# Altium PCB TP1.PcbDoc
Units mm, origin at the board's own origin, x right, y up, seen from the top; angles counter-clockwise.
Board outline 100 x 50.04 mm, 2 copper layers (Top Layer, Bottom Layer); 28 components, 19 nets, 87 pads, 4 vias.
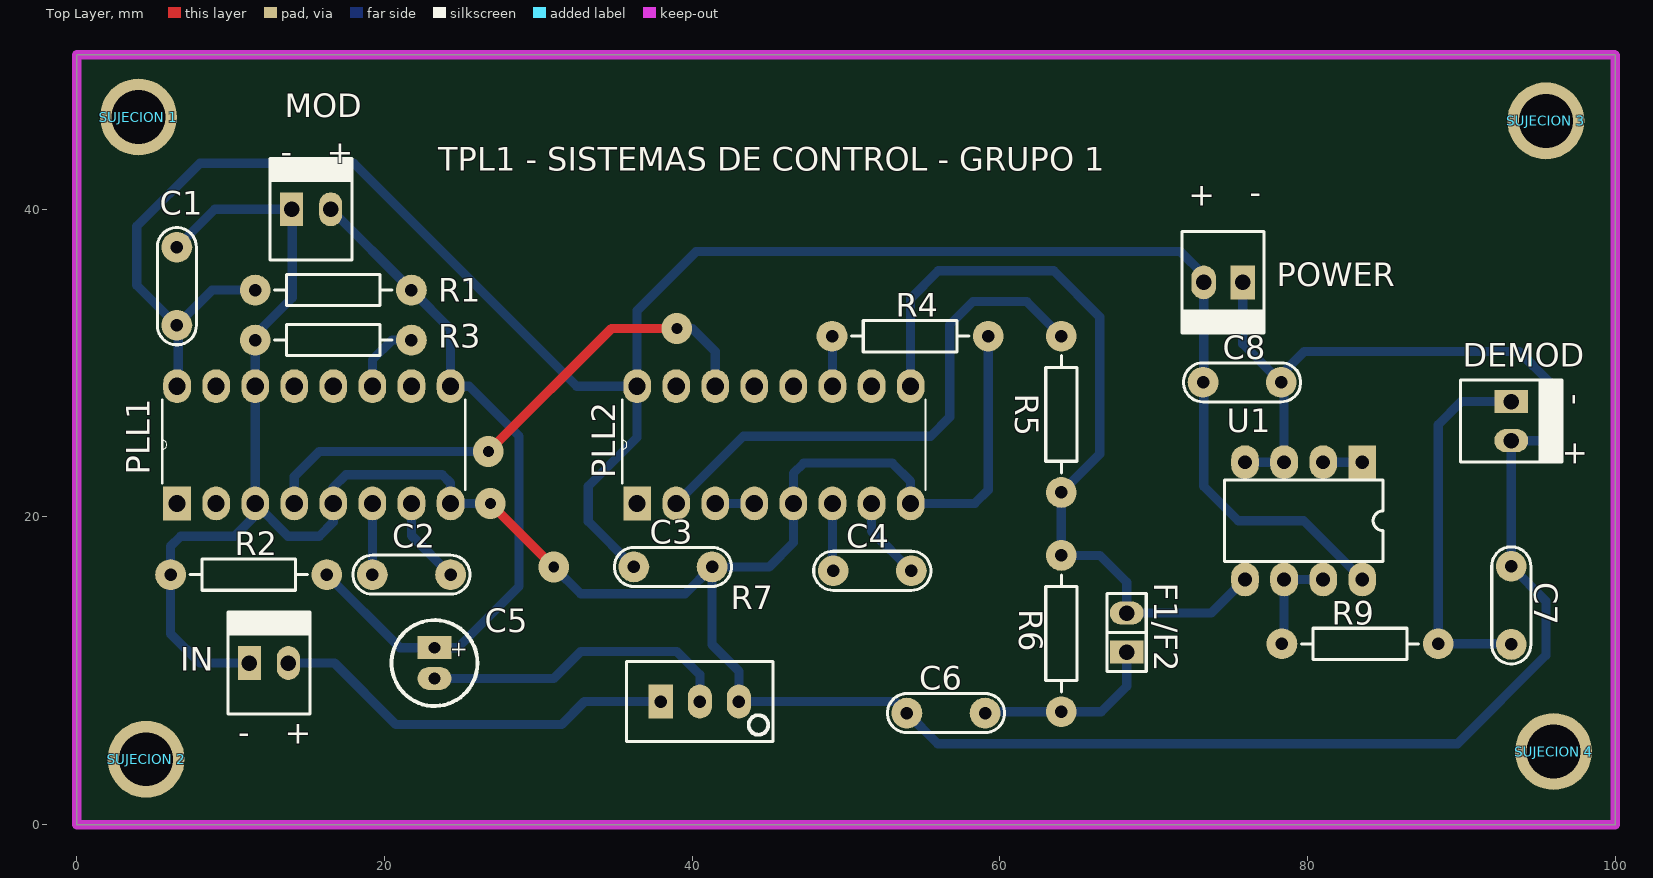
[diagram p0: Top Layer view]
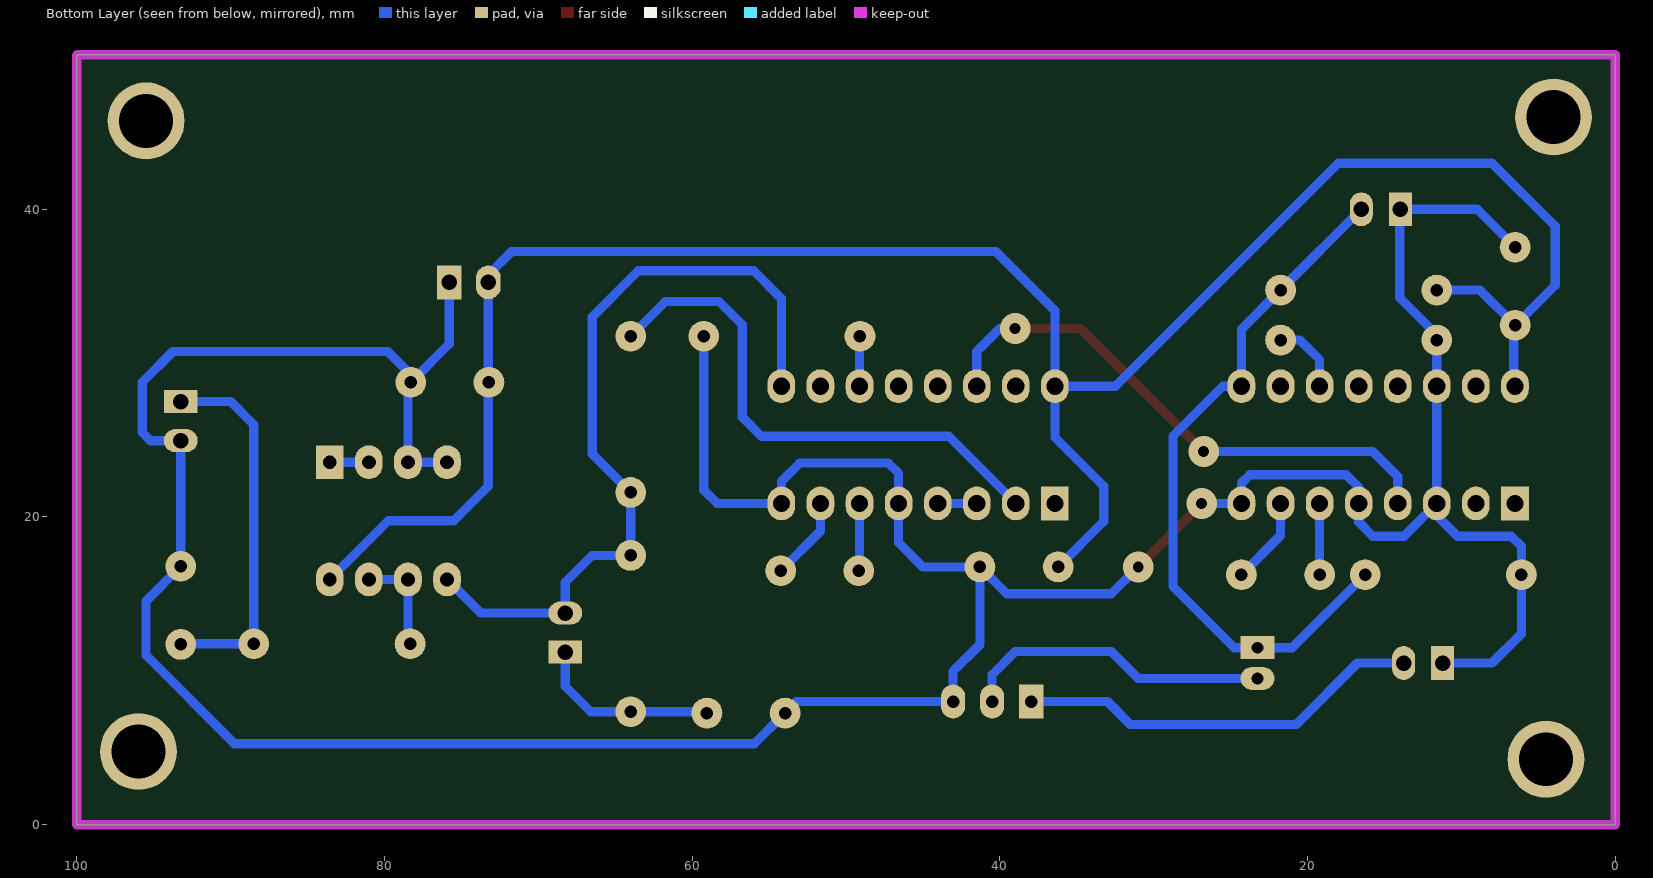
[diagram p1: Bottom Layer view, seen from below]
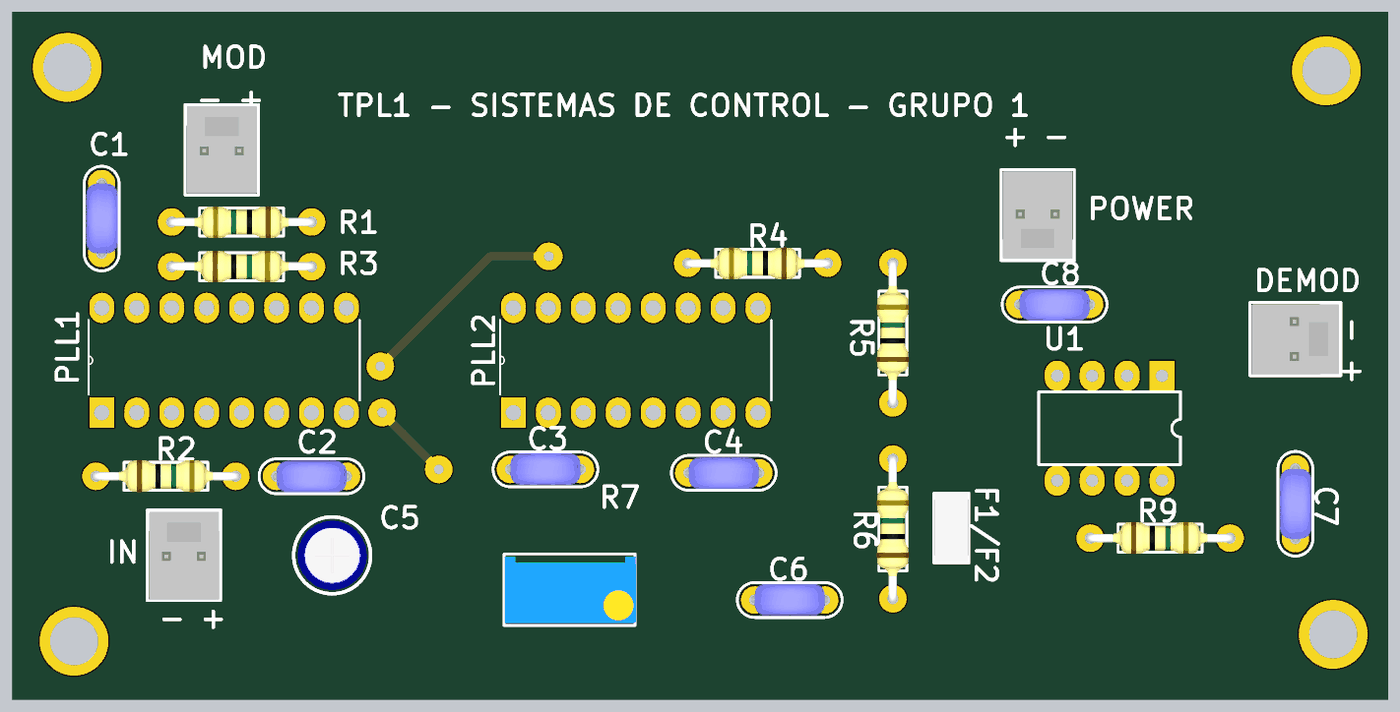
[diagram p2: 3D render of the assembled board from above, using the file's embedded part models]

## Layer stack, top to bottom
Top Solder: solder mask 0.0102, Solder Resist, Dk 3.5
Top Layer: signal copper 0.0356
Dielectric 1: dielectric 0.32, FR-4, Dk 4.8
Bottom Layer: signal copper 0.0356
Bottom Solder: solder mask 0.0102, Solder Resist, Dk 3.5

## Board outline
0,0 0,50.038 99.962,50.038 100,50 100,0

## Design rules (kind name [scope] priority, off if disabled: settings)
Clearance [All] p1: gap=0.254 ignorepadtopadclearanceinfootprint=FALSE except(0: Arc-Hole Track-Hole SMDPad-Hole THPad-Hole Via-Hole Fill-Hole Poly-Hole Region-Hole Text-Hole)
PolygonConnect [All] p1: connectstyle=Relief reliefconductorwidth=0.254 reliefentries=4 polygonreliefangle="90 Angle" airgapwidth=0.254
RoutingVias [All] p1: holewidth=0.711 width=1.27 viastyle="Through Hole" minholewidth=0.711 minwidth=1.27 maxholewidth=0.711 maxwidth=1.27
SolderMaskExpansion [All] p1: expansion=0.102
Width [All] p1: maxlimit=0.6 minlimit=0.6 preferedwidth=0.6
30 further rules are at their usual default settings.

## Components (designator, comment, footprint, x,y, rotation, side; value= is the part's Value field where it differs from the comment)
C1 "100nf" CAP200 6.5,35 r90 top
C2 "100pf" CAP200 21.75,16.25 r0 top
C3 "100nf" CAP200 38.75,16.75 r180 top
C4 "100pf" CAP200 51.71,16.5 r0 top
C5 "10uf" CAP100RP 23.25,10.5 r270 top
C6 "1nf" CAP200 56.5,7.25 r180 top
C7 "100pf" CAP200 93.25,14.25 r90 top
C8 "100nf" CAP200 75.75,28.75 r0 top
DEMOD "DEMODULADOR" MOLEX2#1 93.25,27.5 r270 top
F1/F2 "JUMPER" JUMPER2 68.25,12.48 r90 top
IN "IN" MOLEX2#1 11.21,10.5 r0 top
MOD "MODULACION" MOLEX2#1 13.96,40 r0 top
PLL1 "CD74HC4046AE" *DIP254P762X508-16 24.29,28.5 r90 top
PLL2 "CD74HC4046AE" *DIP254P762X508-16 54.2,28.5 r90 top
POWER "MOLEX2" MOLEX2#2 75.79,35.25 r180 top
R1 "10K" RES400 21.75,34.75 r180 top
R2 "10K" RES400 6.09,16.25 r0 top
R3 "8K2" RES400 11.59,31.5 r0 top
R4 "8K2" RES400 59.25,31.75 r180 top
R5 "10K" RES400 64,21.59 r90 top
R6 "1K8" RES400 64,7.34 r90 top
R7 "10K" "PRESET V" 40.5,8 r0 top
R9 "5K6" RES400 78.34,11.75 r0 top
"SUJECION 1" "SUJECION" "SUJECION (5.00MM - 3.50MM)" 4,46 r90 top
"SUJECION 2" "SUJECION" "SUJECION (5.00MM - 3.50MM)" 4.5,4.25 r90 top
"SUJECION 3" "SUJECION" "SUJECION (5.00MM - 3.50MM)" 95.5,45.75 r90 top
"SUJECION 4" "SUJECION" "SUJECION (5.00MM - 3.50MM)" 96,4.75 r90 top
U1 "LM358AJG" JG008 79.75,19.75 r180 top

## Footprints (in the part's own frame and the unit in brackets; to place one, negate y for a bottom-side part, rotate by r counter-clockwise, add the part's x,y. Pads: shape width x height; smd on the part's side, far side on the other; paste and mask are expansions set on the pad)
*DIP254P762X508-16 [mm]
  rect 2.2x1.8 hole 1.118: 1(-7.62,17.78)
  oval 2.2x1.8 hole 1.118: 2(-7.62,15.24) 3(-7.62,12.7) 4(-7.62,10.16) 5(-7.62,7.62) 6(-7.62,5.08) 7(-7.62,2.54) 8(-7.62,0) 9(0,0) 10(0,2.54) 11(0,5.08) 12(0,7.62) 13(0,10.16) 14(0,12.7) 15(0,15.24) 16(0,17.78)
  silkscreen extent -6.73,-0.97 -0.89,18.75
CAP100RP [mm] "Body diameter 5mm"
  rect 1.5x2.2 hole 0.762: 1(-1,0)
  oval 1.5x2.2 hole 0.762: 2(1,0)
  silkscreen extent -2.79,-2.79 2.79,2.79, body extent -2.53,-2.51 2.53,2.54, height 11.53
CAP200 [mm]
  round 2 hole 0.813: 1(-2.54,0) 2(2.54,0)
  silkscreen extent -3.81,-1.27 3.81,1.27, body extent -2.79,-1.17 2.79,1.12, height 6.24
JG008 [mm] "DIP; 8 Leads; Row Spacing 7.62 mm; Pitch 2.54 mm"
  rect 1.8x2.2 hole 0.9: 1(-3.81,-3.81)
  oval 1.8x2.2 hole 0.9: 2(-1.27,-3.81) 3(1.27,-3.81) 4(3.81,-3.81) 5(3.81,3.81) 6(1.27,3.81) 7(-1.27,3.81) 8(-3.81,3.81)
  silkscreen extent -5.15,-2.65 5.15,2.65
JUMPER2 [mm]
  rect 1.5x2.2 hole 1.016: 1(-1.27,0)
  oval 1.5x2.2 hole 1.016: 2(1.27,0)
  silkscreen extent -2.54,-1.27 2.54,1.27, body extent -2.46,-1.27 2.54,1.27, height 9.5
MOLEX2#1 [mm]
  rect 1.5x2.2 hole 1.016: 1(0,0)
  oval 1.5x2.2 hole 1.016: 2(2.54,0)
  silkscreen extent -1.4,-3.3 3.94,3.3, body extent -1.27,-3.18 3.81,3.18, height 10.74
MOLEX2#2 [mm]
  rect 1.6x2.2 hole 1.016: 1(0,0)
  oval 1.6x2.2 hole 1.016: 2(2.54,0)
  silkscreen extent -1.4,-3.3 3.94,3.3, body extent -1.27,-3.17 3.81,3.18, height 10.74
"PRESET V" [mm]
  rect 1.575x2.2 hole 0.813: 1(-2.54,0)
  oval 1.575x2.2 hole 0.813: 2(0,0) 3(2.54,0)
  silkscreen extent -4.76,-2.6 4.76,2.6, body extent -4.7,-2.42 4.83,2.42, height 11.55
RES400 [mm]
  round 2 hole 0.813: 1(0,0) 2(10.16,0)
  silkscreen extent 1.27,-1.02 8.89,1.02, body extent -0.3,-1.14 10.46,1.17, height 2.43
"SUJECION (5.00MM - 3.50MM)" [mm]
  round 5 hole 3.5: 1(0,0)

## Part data
C1 C2 C3 C4 C6 C7 C8: library part CAP
C5: library part CAPPOL
DEMOD IN MOD: library part MOLEX2
PLL1 PLL2: Package="DIP-16 Intersil", Availability=Unavailable, MF="Texas Instruments", MP=CD74HC4046AE, Price=None, SnapEDA_Link=https://www.snapeda.com/parts/CD74HC4046AE/Texas%20Instruments/view-part/?ref=snap
R1 R2 R3 R4 R5 R6 R9: library part RES
R7: library part PRESET
U1: "Dual Operational Amplifier", ComponentLink1Description="Manufacturer Link", ComponentLink1URL=http://www.ti.com/, DatasheetVersion=Aug-1988, LatestRevisionDate=04-Mar-2005, LatestRevisionNote="Stylized 3D Model Added.", PackageDescription="DIP; 8 Leads; Row Spacing 7.62 mm; Pitch 2.54 mm", PackageReference=JG008, PackageVersion=Jan-1995, Published=15-Apr-2002, Publisher="Altium Limited"

## Via types
v1: diameter 2, hole 0.711, Top Layer to Bottom Layer, 4 vias

## Nets (pads, with @x,y where several pads share a name; then routed paths per layer and width w, separated by ;. In a path a pad name is that pad's centre, name@x,y a point inside that pad or via, vN(x,y) a via of type N, cw(c..) or ccw(c..) an arc to the next point about the centre after c; other vN are vias at no path point)
FM: PLL1.4 PLL2.14 | length 36
  Top Layer w0.6: v1(26.75,24.25) 34.75,32.25 v1(39,32.25)
  Bottom Layer w0.6: PLL1.4 14.13,22.63 15.75,24.25 v1(26.75,24.25) ; v1(39,32.25) 40,32.25 41.5,30.75 PLL2.14
GND: C1.2 C3.1 C6.2 C7.2 C8.2 DEMOD.2 IN.1 MOD.1 PLL1.3 PLL1.5 PLL1.8 PLL1.14 PLL2.5 PLL2.8 POWER.1 R2.1 R3.1 R4.1 R7.3 U1.3 U1.4 | length 242.5
  Top Layer w0.6: v1(26.88,20.88) 26.88,20.87 v1(31,16.75)
  Bottom Layer w0.6: C1.2 8.96,40 MOD.1 ; IN.1 8,10.5 6.09,12.41 R2.1 6.09,18.09 6.75,18.75 10.25,18.75 11.59,20.09 PLL1.3 ; MOD.1@14,40 14,34.25 11.59,31.84 R3.1 PLL1.14 PLL1.3 ; v1(26.88,20.88) PLL1.8 24.29,22.21 23.75,22.75 17.5,22.75 16.67,21.92 PLL1.5 16.67,19.67 15.75,18.75 13.72,18.75 PLL1.3 ; v1(31,16.75) 32.75,15 39.54,15 C3.1 ; R4.1 59.25,21.75 58.38,20.88 PLL2.8 54.2,22.3 53,23.5 47.25,23.5 46.58,22.83 PLL2.5 46.58,18.33 45,16.75 C3.1 ; POWER.1 75.79,31.25 C8.2@78.04,29 ; U1.4 U1.3 78.48,28.56 C8.2@78.04,29 ; C8.2 C8.2@78.04,29 ; C3.1 41.29,11.71 43.04,9.96 R7.3 53.21,8 C6.2 55.96,5.25 89.75,5.25 95.5,11 95.5,14.54 C7.2 DEMOD.2 95.21,24.96 95.75,25.5 95.75,28.75 93.75,30.75 79.79,30.75 C8.2@78.04,29
NetC2_1: C2.1 PLL1.6 | length 4.6
  Bottom Layer w0.6: C2.1 PLL1.6
NetC2_2: C2.2 PLL1.7 | length 5.7
  Bottom Layer w0.6: PLL1.7 21.75,18.79 C2.2
NetC4_1: C4.1 PLL2.6 | length 4.4
  Bottom Layer w0.6: PLL2.6 49.12,16.55 C4.1
NetC4_2: C4.2 PLL2.7 | length 5.5
  Bottom Layer w0.6: PLL2.7 51.66,19.09 C4.2
NetC5_1: C5.1 MOD.2 PLL1.9 R1.1 R2.2 | length 46.4
  Bottom Layer w0.6: R2.2 21,11.5 24.75,11.5 28.75,15.5 28.75,25.25 25.5,28.5 PLL1.9 24.29,32.21 R1.1 MOD.2
NetC5_2: C5.2 R7.2 | length 20.3
  Bottom Layer w0.6: C5.2 31,9.5 32.75,11.25 39,11.25 40.5,9.75 R7.2
NetC6_1: C6.1 F1/F2.1 R6.1 | length 12.1
  Bottom Layer w0.6: C6.1 59.13,7.34 R6.1 66.59,7.34 68.25,9 F1/F2.1
NetC7_1: C7.1 DEMOD.1 R9.2 | length 24.4
  Bottom Layer w0.6: C7.1 93.21,11.75 R9.2 88.5,26 90,27.5 DEMOD.1
NetF1/F2_2: F1/F2.2 PLL2.9 R5.1 R6.2 U1.5 | length 52.1
  Bottom Layer w0.6: PLL2.9 54.2,34.2 56,36 63.5,36 66.5,33 66.5,24.09 R5.1 R6.2 66.5,17.5 68.25,15.75 F1/F2.2 73.75,13.75 U1.5
NetIN_2: IN.2 R7.1 | length 26
  Bottom Layer w0.6: IN.2@14.25,10.5 16.75,10.5 20.75,6.5 31.5,6.5 33,8 R7.1
NetPLL1_11: PLL1.11 R3.2 | length 4.9
  Bottom Layer w0.6: PLL1.11 19.21,30.21 20.5,31.5 21.5,31.5 R3.2@21.75,31.25
NetPLL2_2: PLL2.2 R5.2 | length 34.9
  Bottom Layer w0.6: PLL2.2 43.33,25.25 55.5,25.25 56.75,26.5 56.75,32.5 58.25,34 61.75,34 R5.2
NetPLL2_3: PLL2.3 PLL2.4 | length 2.5
  Bottom Layer w0.6: PLL2.3 PLL2.4
NetPLL2_11: PLL2.11 R4.2 | length 3.3
  Bottom Layer w0.6: R4.2 49.12,31.72 PLL2.11
NetR9_1: R9.1 U1.6 U1.7 | length 6.8
  Bottom Layer w0.6: R9.1 78.48,11.89 U1.6 U1.7
NetU1_1: U1.1 U1.2 | length 2.5
  Bottom Layer w0.6: U1.2 U1.1
VCC: C1.1 C3.2 C8.1 PLL1.16 PLL2.16 POWER.2 R1.2 U1.8 | length 142.7
  Bottom Layer w0.6: PLL1.16 6.59,28.58 6.59,32.46 C1.1@6.71,32.46 ; R1.2 8.79,34.75 C1.1 3.893,35.067 3.893,38.893 8,43 18,43 32.5,28.5 PLL2.16 ; C3.2 33.25,19.71 33.25,22 36.42,25.17 PLL2.16 ; U1.8 79.75,19.75 75.5,19.75 73.25,22 73.25,35.75 71.75,37.25 40.25,37.25 36.42,33.42 PLL2.16
pads on no net: "SUJECION 1.1" "SUJECION 2.1" "SUJECION 3.1" "SUJECION 4.1" PLL1.1 PLL1.2 PLL1.10 PLL1.12 PLL1.13 PLL1.15 PLL2.1 PLL2.10 PLL2.12 PLL2.13 PLL2.15

## Keep-outs
Keep-Out Layer:
  the board outline again, w0.625

## Silkscreen, mask and mechanical layers (free items; w line width, h text height)
Top Overlay:
  text "-" at 13.25,43 h1.52
  text "+" at 16.25,43 h1.52
  text "TPL1 - SISTEMAS DE CONTROL - GRUPO 1" at 23.5,42.5 h1.52
  text "+" at 74,41.5 h1.52 r180
  text "-" at 77,41.5 h1.52 r180
  text "-" at 96.75,28 h1.52 r270
  text "+" at 96.75,25 h1.52 r270
  text "-" at 10.5,5.25 h1.52
  text "+" at 13.5,5.25 h1.52

## Text inside footprints (layer, text, board x,y; h text height)
C5: Top Overlay "+" at 24.418,11.948 h1.02 r270